# Altium PCB newest.PcbDoc
Units mil, origin at the board's own origin, x right, y up, seen from the top; angles counter-clockwise.
Board outline 1180 x 2621.21 mil, 4 copper layers (Top Layer, GND, 3v3, Bottom Layer), stack 23.756 mil thick; 54 components, 49 nets, 266 pads, 40 vias.
Unrouted connection lines stored in the file: 44.
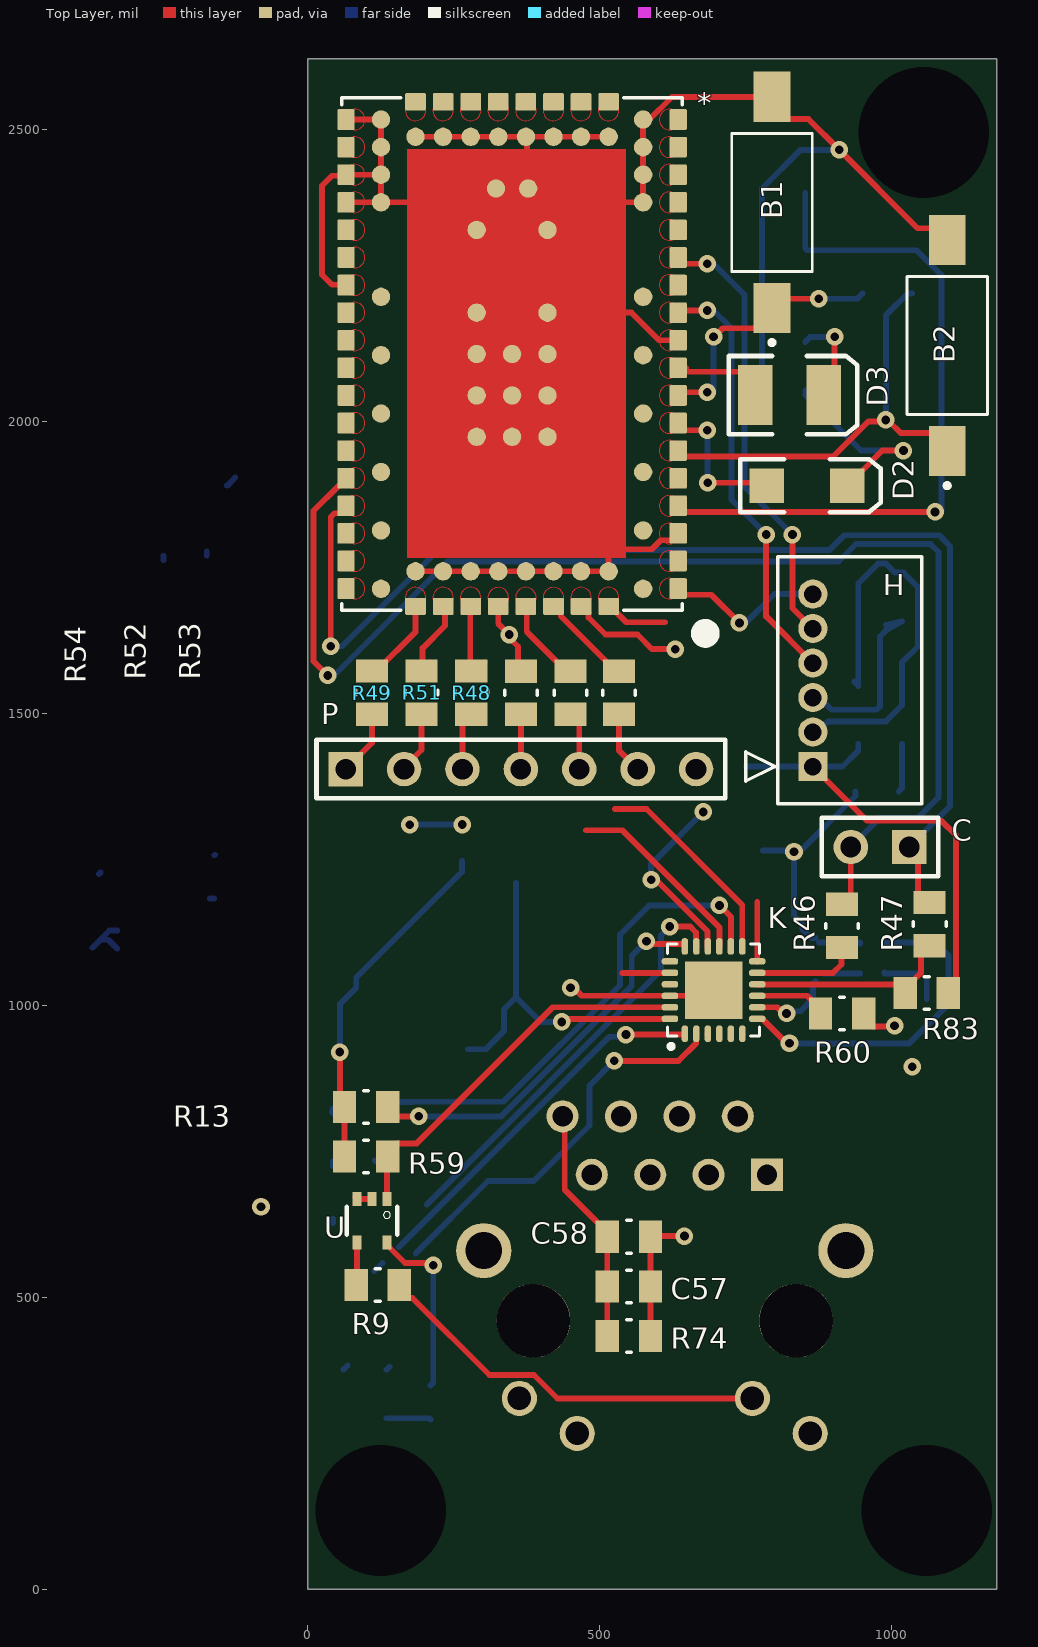
[diagram p0: Top Layer view]
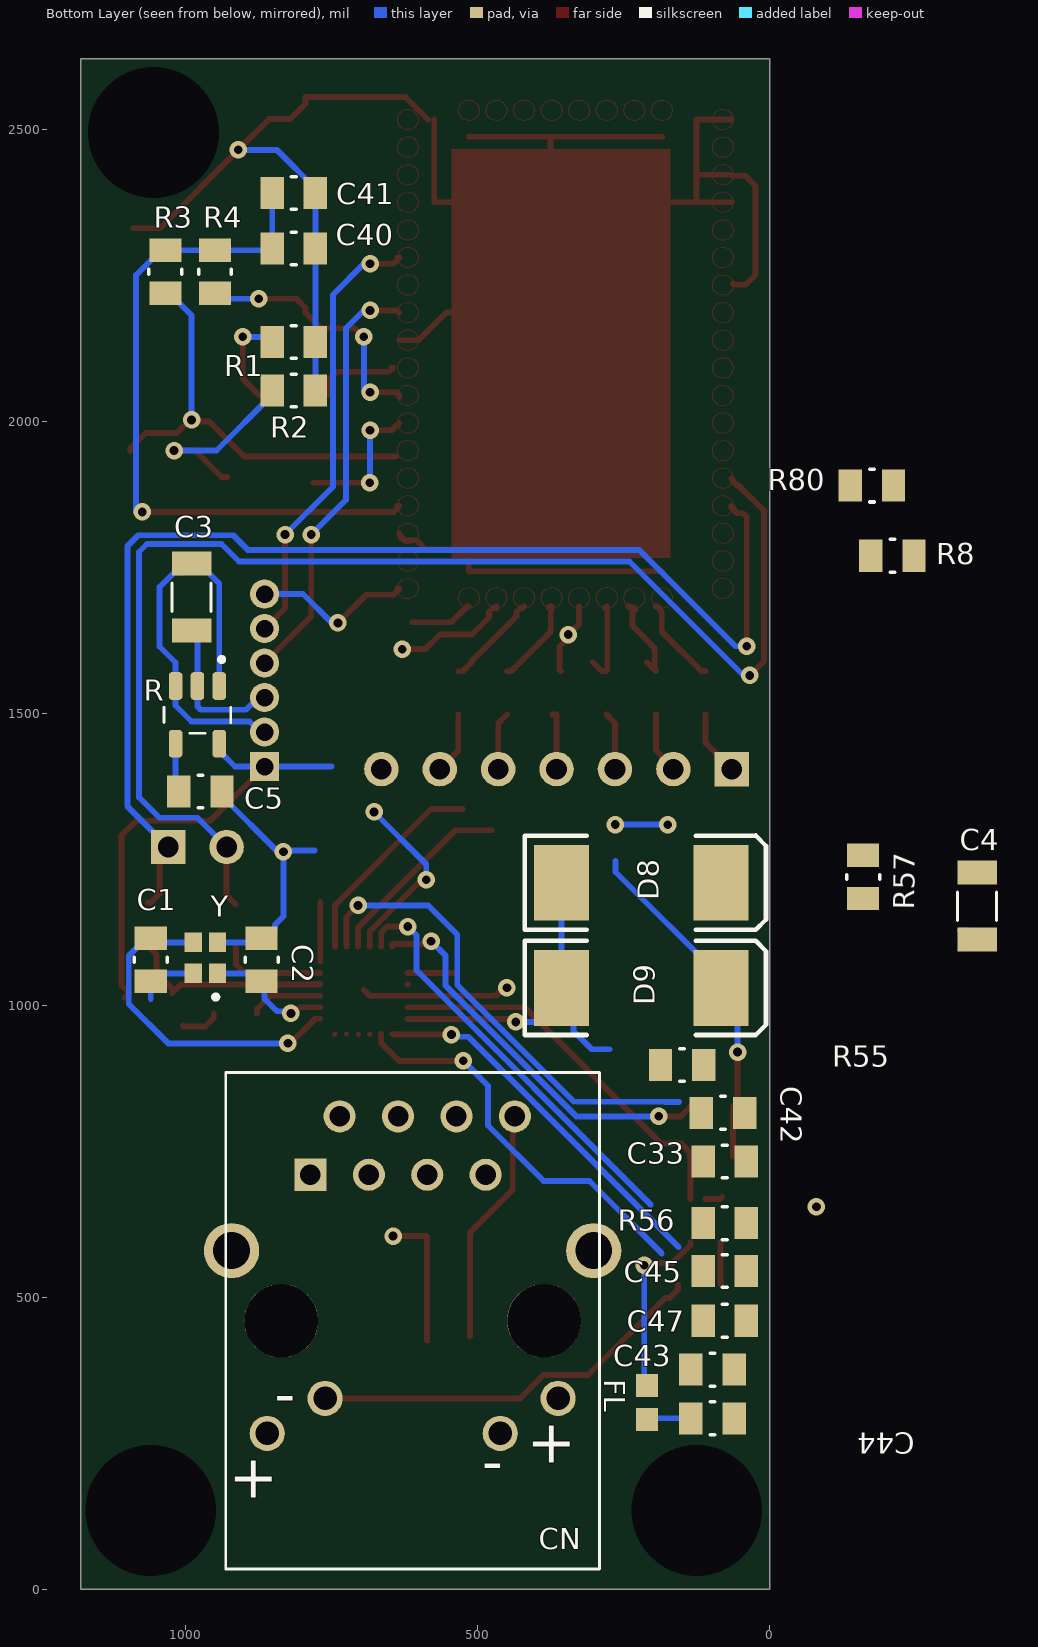
[diagram p1: Bottom Layer view, seen from below]
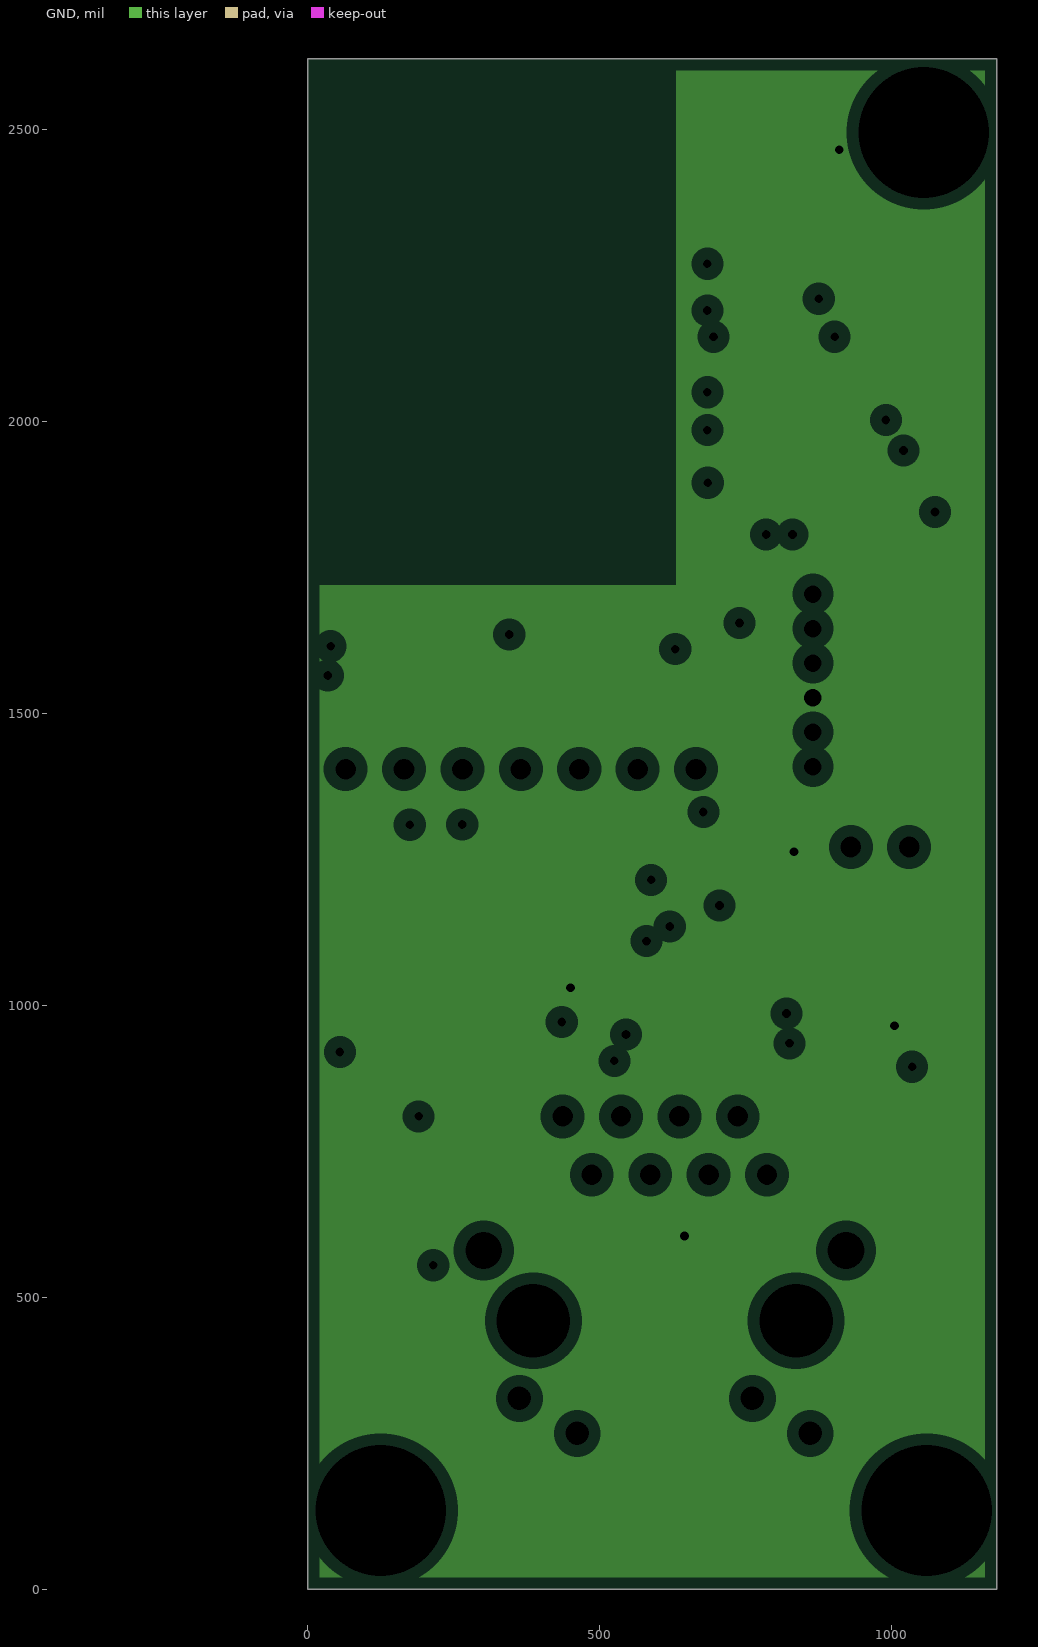
[diagram p2: GND, clearances drawn from the general rule]
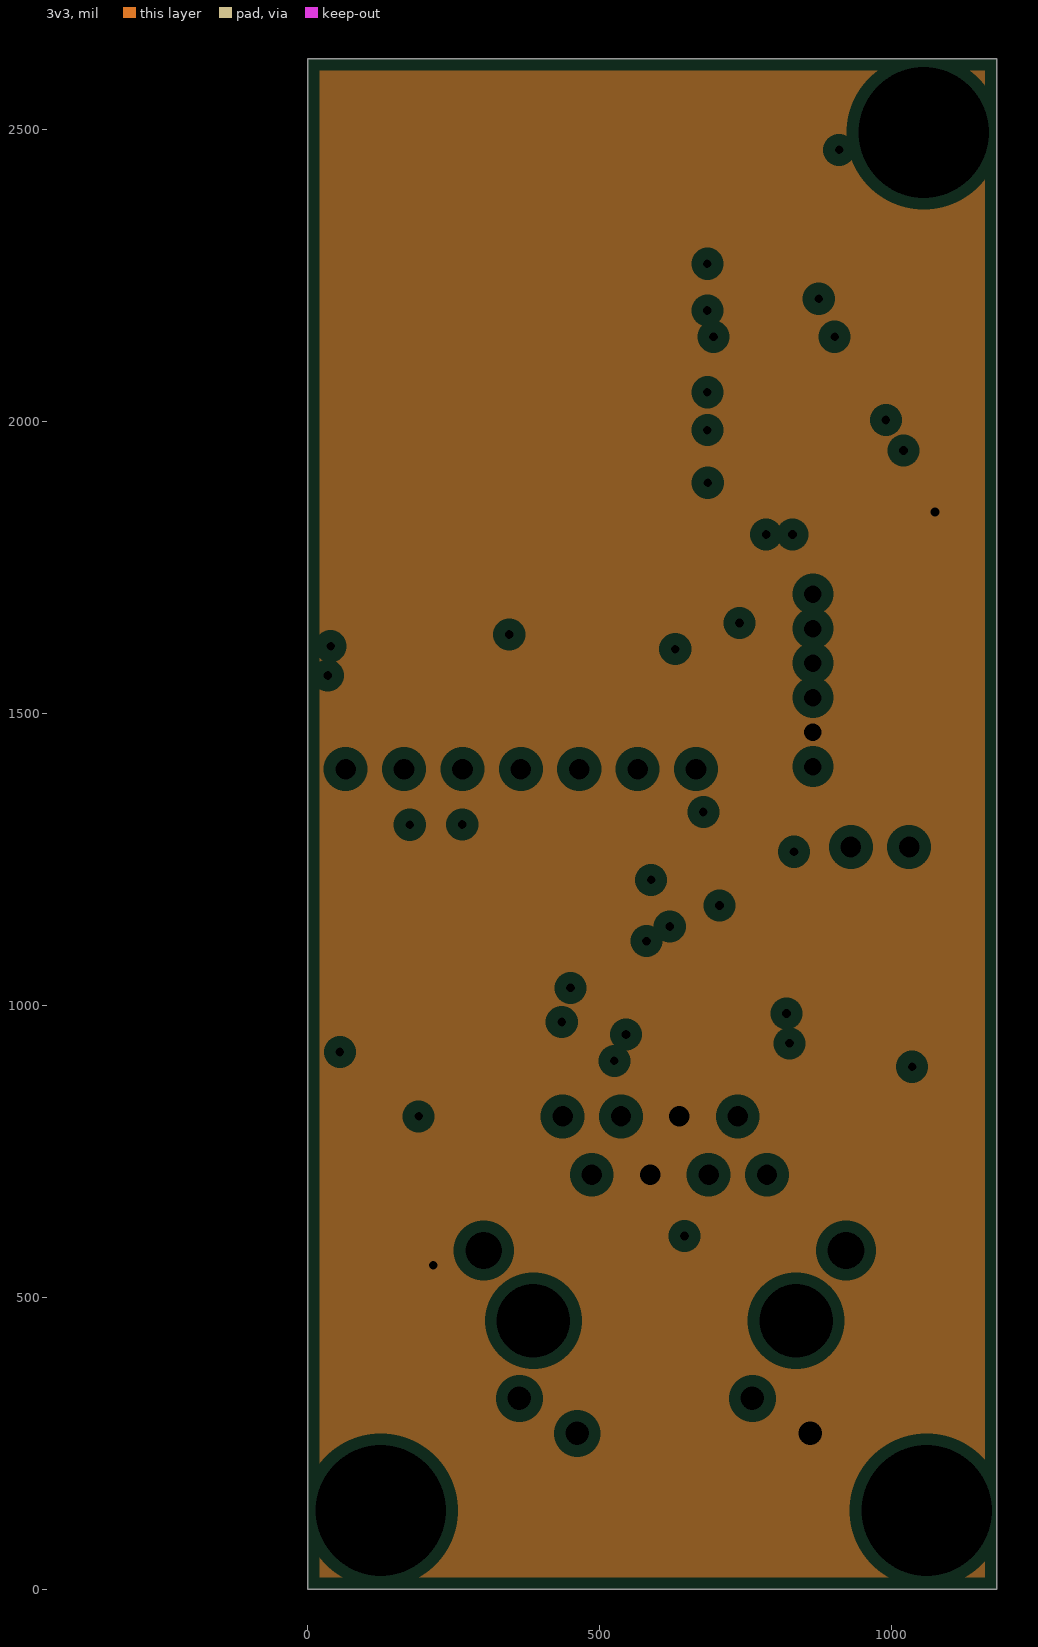
[diagram p3: 3v3, clearances drawn from the general rule]

## Layer stack, top to bottom
Top Solder: solder mask 0.4, Solder Resist, Dk 3.5
Top Layer: signal copper 1.4
Dielectric 2: prepreg 2.8, PP-006, Dk 4.1
GND: plane copper 1.378, net GND
Dielectric 1: dielectric 12.6, FR-4, Dk 4.8
3v3: plane copper 1.378, net 3v3
Dielectric 3: prepreg 2.8, PP-006, Dk 4.1
Bottom Layer: signal copper 1.4
Bottom Solder: solder mask 0.4, Solder Resist, Dk 3.5

## Board outline
0,2621.21 0,0 1180,0 1180,2621.21

## Design rules (kind name [scope] priority, off if disabled: settings)
Clearance [All] p1: gap=5 ignorepadtopadclearanceinfootprint=FALSE // Default=10mil
DiffPairsRouting [All] p1: maxlimit=10 minlimit=10 mostfreqgap=10 toplayer_minwidth=8 toplayer_maxwidth=15 toplayer_prefwidth=15 bottomlayer_minwidth=10 bottomlayer_maxwidth=15 bottomlayer_prefwidth=15 maxuncoupledlength=500 // DefaultMinWidth=15mil
HoleSize [All] p1: absolutevalues=TRUE maxlimit=150 minlimit=1 maxpercent=80.000 minpercent=20.000 // MaximumDefault=100mil
MinimumSolderMaskSliver [All] p1: minsoldermaskwidth=1 // Default=10mil
PlaneClearance [All] p1: clearance=20
PlaneConnect [All] p1: planeconnectstyle=Relief reliefexpansion=20 reliefentries=4 reliefconductorwidth=10 reliefairgap=10
PolygonConnect [All] p1: connectstyle=Relief reliefconductorwidth=10 reliefentries=4 polygonreliefangle="90 Angle" airgapwidth=10
RoutingVias [All] p1: holewidth=28 width=50 viastyle="Through Hole" minholewidth=28 minwidth=50 maxholewidth=28 maxwidth=50
SilkToSolderMaskClearance [IsPad] p1: minsilkscreentomaskgap=4 clearancetoexposedcopper=TRUE // Default=10mil
SolderMaskExpansion [All] p1: expansion=4 istentingtop=FALSE
Width [All] p1: maxlimit=10 minlimit=8 preferedwidth=10 minimp=50.000000 maximp=50.000000 favimp=50.000000 // MinWidthDefault=10mil
24 further rules are at their usual default settings.

## Classes and differential pairs
differential pair PHY_TX: +PHY_TX_P -PHY_TX_N
differential pair PHY_RX: +PHY_RX_P -PHY_RX_N

## Components (designator, comment, footprint, x,y, rotation, side; value= is the part's Value field where it differs from the comment)
* "ODIN-W262" ODIN-W262 349.95,2115.35 r90 top
B1 "push button" TECO-FSMSM 795,2375 r90 top
B2 "push button" TECO-FSMSM 1095,2130 r90 top
C "Header 2" HDR1X2 1030,1271.21 r180 top
C1 "22uF 10V" 0805 1060,1078.21 r270 bottom value=22uF
C2 "22uF 10V" 0805 870,1078.21 r90 bottom value=22uF
C3 "10UF 25V" 1206 990,1699.24 r270 bottom value=10uF
C4 "10UF 25V" 1206 -355,1170 r270 bottom value=10uF
C5 "10nF 50V" 0805 975,1366.21 r180 bottom value=10nF
C33 "2.2uF 16V" 0805 77,732.75 r0 bottom value=2.2uF
C40 "100nF 50V" 0805 815,2296.21 r0 bottom value=100nF
C41 "100nF 50V" 0805 815,2391.21 r0 bottom value=100nF
C42 "100nF 50V" 0805 80,816.02 r0 bottom value=100nF
C43 "2.2uF 16V" 0805 98,376.18 r0 bottom value=2.2uF
C44 "100nF 50V" 0805 98,292.9 r0 bottom value=100nF
C45 "100nF 50V" 0805 77,545 r0 bottom value=100nF
C47 "100nF 50V" 0805 77,460 r0 bottom value=100nF
C57 "100nF 50V" 0805 550,518.79 r0 top value=100nF
C58 "100nF 50V" 0805 550,603.79 r0 top value=100nF
CN "CN J00-0045NL" "RJ45 J00-0045NL" 611.47,460 r0 bottom
D2 "LED2" 3.2X1.6X1.1 855,1890 r0 top
D3 "LED3" 3.5X2.8X1.9 825,2045 r0 top
D8 "Diode" SMC 220,1210 r180 bottom
D9 "Diode" SMC 220,1030 r180 bottom
FL "BLM18PG300SN1D" BEADC1608X95N 210,320 r270 bottom
H "S6B-ZR(LF)(SN)" S6B-ZR_JST 865,1409.05 r90 top
K "KSZ8081RNAIA-TR" QFN50P400X400X90-25N 695,1026.21 r90 top
P "Header 7" HDR1X7 65,1404.54 r0 top
R "LP2992IM5-1.8" SOT95P280X145-5N 980,1497.5 r270 bottom
R1 "270" 0805 815,2136.21 r0 bottom
R2 "270" 0805 815,2052.94 r0 bottom
R3 "1k" 0805 1035,2256.21 r90 bottom
R4 "1k" 0805 950,2256.21 r90 bottom
R8 "JUMPER" 0805 -210,1770 r180 bottom value=0
R9 "120" 0805 120,521.21 r180 top
R13 "1k" 0805 100,826.21 r180 top
R46 "10.0" 0805 915,1136.21 r90 top
R47 "10.0" 0805 1065,1139.21 r90 top
R48 "10.0" 0805 280,1535.63 r270 top
R49 "10.0" 0805 110,1535.63 r270 top
R51 "10.0" 0805 195,1535.63 r270 top
R52 "10.0" 0805 450,1535.24 r90 top
R53 "10.0" 0805 533.28,1535.24 r90 top
R54 "10.0" 0805 365,1535.24 r90 top
R55 "1k" 0805 150,898.12 r180 bottom
R56 "1k" 0805 77,627.1 r180 bottom
R57 "1k" 0805 -160,1220 r90 bottom
R59 "1k" 0805 100,741.21 r0 top
R60 "6.8k" 0805 915,986.21 r180 top
R74 "16m" 0805 550,433.79 r180 top
R80 "JUMPER" 0805 -175,1890 r0 bottom value=0
R83 "4.7k" 0805 1060,1021.21 r180 top
U "NC7SZ125" SC70-5 110,631.21 r180 top
Y "ECS-250-10-37-JTN-TR" XTAL_ECS-250-10-37-JTN-TR 966.51,1081.21 r90 bottom

## Footprints (in the part's own frame and the unit in brackets; to place one, negate y for a bottom-side part, rotate by r counter-clockwise, add the part's x,y. Pads: shape width x height; smd on the part's side, far side on the other; paste and mask are expansions set on the pad)
3.2X1.6X1.1 [mm]
  rect 1.5x1.5 smd: 1(-1.75,0) 2(1.75,0)
  silkscreen extent -2.9,-1.15 3.2,1.15
3.5X2.8X1.9 [mm] "SM LED; 2 C-Bend Leads; Body 3.5 x 2.8 x 1.9 mm, inc leads (LxWxH typ)"
  rect 1.5x2.6 smd: 1(-1.5,0) 2(1.5,0)
  silkscreen extent -2.65,-1.7 2.95,1.7
0805 [mil]
  rect 40x55 smd: 1(-37,0) 2(37,0)
  silkscreen extent -4,-28 4,28
1206 [mm]
  rect 1.05x1.72 smd: 1(-1.46,0) 2(1.46,0)
  silkscreen extent -0.62,-0.85 0.62,0.85
BEADC1608X95N [mm]
  rect 1x0.97 smd: 1(-0.735,0) 2(0.735,0)
HDR1X2 [mm] "Connector; Header; 2 Position"
  rect 1.5x1.5 hole 0.9: 1(0,0)
  round 1.5 hole 0.9: 2(2.54,0)
  silkscreen extent -1.27,-1.27 3.81,1.27
HDR1X7 [mm] "Connector; Header; 7 Position"
  rect 1.5x1.5 hole 0.9: 1(0,0)
  round 1.5 hole 0.9: 2(2.54,0) 3(5.08,0) 4(7.62,0) 5(10.16,0) 6(12.7,0) 7(15.24,0)
  silkscreen extent -1.27,-1.27 16.51,1.27
ODIN-W262 [mm]
  round 0.8 smd: 1(6.6,-5.7) 2(7.8,-5.7) 3(9,-5.7) 4(10.2,-5.7) 5(9.45,-4.2) 6(9.45,-3) 7(9.45,-1.8) 8(9.45,-0.6) 9(9.45,0.6) 10(9.45,1.8) 11(9.45,3) 12(9.45,4.2) 13(10.2,5.7) 14(9,5.7) 15(7.8,5.7) 16(6.6,5.7) 17(-9.45,4.2) 18(-9.45,3) 19(-9.45,1.8) 20(-9.45,0.6) 21(-9.45,-0.6) 22(-9.45,-1.8) 23(-9.45,-3) 24(-9.45,-4.2) 25(-3.6,-1.54) 26(-1.8,-1.54) 27(0,-1.54) 28(1.8,-1.54) 29(5.4,-1.54) 30(7.2,-0.7) 31(-3.6,0) 32(-1.8,0) 33(0,0) 34(-3.6,1.54) 35(-1.8,1.54) 36(0,1.54) 37(1.8,1.54) 38(5.4,1.54) 39(7.2,0.7) TP1(2.49,-5.7) TP2(2.49,5.7) TP3(-0.05,-5.7) TP4(-0.05,5.7) TP5(-2.59,-5.7) TP6(-2.59,5.7) TP7(-5.13,-5.7) TP8(-5.13,5.7) TP9(-7.67,-5.7) TP10(-7.67,5.7) TP11(-10.21,-5.7) TP12(-10.21,5.7)
  rrect15% 0.9x0.75 smd paste-1 mask+0: A1(-10.2,-7.225) A2(-9,-7.225) A3(-7.8,-7.225) A4(-6.6,-7.225) A5(-5.4,-7.225) A6(-4.2,-7.225) A7(-3,-7.225) A8(-1.8,-7.225) A9(-0.6,-7.225) A10(0.6,-7.225) A11(1.8,-7.225) A12(3,-7.225) A13(4.2,-7.225) A14(5.4,-7.225) A15(6.6,-7.225) A16(7.8,-7.225) A17(9,-7.225) A18(10.2,-7.225) C1(10.2,7.225) C2(9,7.225) C3(7.8,7.225) C4(6.6,7.225) C5(5.4,7.225) C6(4.2,7.225) C7(3,7.225) C8(1.8,7.225) C9(0.6,7.225) C10(-0.6,7.225) C11(-1.8,7.225) C12(-3,7.225) C13(-4.2,7.225) C14(-5.4,7.225) C15(-6.6,7.225) C16(-7.8,7.225) C17(-9,7.225) C18(-10.2,7.225)
  rrect15% 0.75x0.9 smd paste-1 mask+0: B1(10.975,-4.2) B2(10.975,-3) B3(10.975,-1.8) B4(10.975,-0.6) B5(10.975,0.6) B6(10.975,1.8) B7(10.975,3) B8(10.975,4.2) D1(-10.975,4.2) D2(-10.975,3) D3(-10.975,1.8) D4(-10.975,0.6) D5(-10.975,-0.6) D6(-10.975,-1.8) D7(-10.975,-3) D8(-10.975,-4.2)
  Top Layer circle w0: c10.2,6.85 r0.45
  Top Layer circle w0: c10.6,4.2 r0.45
  Top Layer circle w0: c10.6,3 r0.45
  Top Layer circle w0: c10.6,1.8 r0.45
  Top Layer circle w0: c10.6,0.6 r0.45
  Top Layer circle w0: c10.6,-0.6 r0.45
  Top Layer circle w0: c10.6,-1.8 r0.45
  Top Layer circle w0: c10.6,-3 r0.45
  Top Layer circle w0: c10.6,-4.2 r0.45
  Top Layer circle w0: c4.2,6.85 r0.45
  Top Layer circle w0: c5.4,6.85 r0.45
  Top Layer circle w0: c9,6.85 r0.45
  Top Layer circle w0: c-10.2,6.85 r0.45
  Top Layer circle w0: c-9,6.85 r0.45
  Top Layer circle w0: c-7.8,6.85 r0.45
  Top Layer circle w0: c-4.2,6.85 r0.45
  Top Layer circle w0: c-3,6.85 r0.45
  Top Layer circle w0: c-1.8,6.85 r0.45
  Top Layer circle w0: c-0.6,6.85 r0.45
  Top Layer circle w0: c0.6,6.85 r0.45
  Top Layer circle w0: c1.8,6.85 r0.45
  Top Layer circle w0: c-5.4,-6.85 r0.45
  Top Layer circle w0: c-9,-6.85 r0.45
  Top Layer circle w0: c10.2,-6.85 r0.45
  Top Layer circle w0: c9,-6.85 r0.45
  Top Layer circle w0: c7.8,-6.85 r0.45
  Top Layer circle w0: c6.6,-6.85 r0.45
  Top Layer circle w0: c5.4,-6.85 r0.45
  Top Layer circle w0: c3,-6.85 r0.45
  Top Layer circle w0: c4.2,-6.85 r0.45
  Top Layer lines w0: -5.414,7.3 cw(c-5.4,6.85) -5.4,6.4 cw(c-5.4,6.85) -5.667,6.488 cw(c-5.4,6.85) -5.486,7.292 cw(c-5.4,6.85) -5.414,7.3 ; 2.968,7.299 cw(c3,6.85) 3.07,7.295 cw(c3,6.85) 3.131,7.281 cw(c3,6.85) 3,6.4 cw(c3,6.85) 2.968,7.299 ; 7.756,7.298 cw(c7.8,6.85) 7.8,6.4 cw(c7.8,6.85) 7.669,7.281 cw(c7.8,6.85) 7.756,7.298 ; 6.53,7.295 cw(c6.6,6.85) 6.6,6.4 cw(c6.6,6.85) 6.53,7.295 ; -6.731,7.281 ccw(c-6.6,6.85) -6.6,6.4 ccw(c-6.6,6.85) -6.731,7.281 ; -11.031,4.331 ccw(c-10.6,4.2) -11.042,4.286 ccw(c-10.6,4.2) -11.045,4.27 ccw(c-10.6,4.2) -11.047,4.251 ccw(c-10.6,4.2) -11.05,4.207 ccw(c-10.6,4.2) -11.05,4.2 ccw(c-10.6,4.2) -11.045,4.13 ccw(c-10.6,4.2) -10.6,3.75 ccw(c-10.6,4.2) -11.031,4.331 ; -11.031,3.131 cw(c-10.6,3) -10.6,2.55 cw(c-10.6,3) -11.05,3 cw(c-10.6,3) -11.045,3.07 cw(c-10.6,3) -11.037,3.107 cw(c-10.6,3) -11.031,3.131 ; -11.05,1.8 ccw(c-10.6,1.8) -11.045,1.73 ccw(c-10.6,1.8) -10.6,1.35 ccw(c-10.6,1.8) -11.05,1.8 ; -11.047,0.651 ccw(c-10.6,0.6) -11.05,0.6 ccw(c-10.6,0.6) -11.031,0.469 ccw(c-10.6,0.6) -10.6,0.15 ccw(c-10.6,0.6) -11.047,0.651 ; -11.05,-0.6 cw(c-10.6,-0.6) -10.6,-1.05 cw(c-10.6,-0.6) -11.031,-0.731 cw(c-10.6,-0.6) -11.05,-0.619 cw(c-10.6,-0.6) -11.05,-0.6 ; -11.048,-1.762 ccw(c-10.6,-1.8) -11.05,-1.8 ccw(c-10.6,-1.8) -11.045,-1.87 ccw(c-10.6,-1.8) -11.039,-1.901 ccw(c-10.6,-1.8) -11.031,-1.931 ccw(c-10.6,-1.8) -10.6,-2.25 ccw(c-10.6,-1.8) -11.048,-1.762 ; -11.031,-2.869 ccw(c-10.6,-3) -11.05,-3 ccw(c-10.6,-3) -11.049,-3.032 ccw(c-10.6,-3) -11.043,-3.076 ccw(c-10.6,-3) -11.042,-3.086 ccw(c-10.6,-3) -11.034,-3.118 ccw(c-10.6,-3) -11.031,-3.131 ccw(c-10.6,-3) -10.6,-3.45 ccw(c-10.6,-3) -11.031,-2.869 ; -11.05,-4.2 ccw(c-10.6,-4.2) -11.031,-4.331 ccw(c-10.6,-4.2) -10.975,-4.449 ccw(c-10.6,-4.2) -10.6,-4.65 ccw(c-10.6,-4.2) -11.05,-4.2 ; 0.6,-6.4 cw(c0.6,-6.85) 0.6,-7.3 cw(c0.6,-6.85) 0.6,-6.4 ; -8.067,-6.488 ccw(c-7.8,-6.85) -8.098,-6.513 ccw(c-7.8,-6.85) -7.8,-7.3 ccw(c-7.8,-6.85) -8.067,-6.488 ; -10.069,-7.281 ccw(c-10.2,-6.85) -10.27,-7.295 ccw(c-10.2,-6.85) -10.2,-7.3 ccw(c-10.2,-6.85) -10.114,-7.292 ccw(c-10.2,-6.85) -10.069,-7.281 ; -3.131,-7.281 ccw(c-3,-6.85) -3.057,-7.296 ccw(c-3,-6.85) -3,-7.3 ccw(c-3,-6.85) -3.131,-7.281 ; -0.514,-7.292 cw(c-0.6,-6.85) -0.6,-7.3 cw(c-0.6,-6.85) -0.614,-7.3 cw(c-0.6,-6.85) -0.67,-7.295 cw(c-0.6,-6.85) -0.514,-7.292 ; -6.67,-7.295 ccw(c-6.6,-6.85) -6.613,-7.3 ccw(c-6.6,-6.85) -6.6,-7.3 ccw(c-6.6,-6.85) -6.67,-7.295 ; -4.27,-7.295 cw(c-4.2,-6.85) -4.169,-7.299 cw(c-4.2,-6.85) -4.2,-7.3 cw(c-4.2,-6.85) -4.27,-7.295 ; -1.87,-7.295 cw(c-1.8,-6.85) -1.73,-7.295 cw(c-1.8,-6.85) -1.787,-7.3 cw(c-1.8,-6.85) -1.8,-7.3 cw(c-1.8,-6.85) -1.87,-7.295 ; 1.87,-7.295 cw(c1.8,-6.85) 1.849,-7.297 cw(c1.8,-6.85) 1.8,-7.3 cw(c1.8,-6.85) 1.87,-7.295
  silkscreen extent -12.4,-8.65 11.15,7.4, body extent -11.15,-7.4 11.15,7.4, height 4.8
QFN50P400X400X90-25N [mm]
  rrect70% 0.71x0.27 smd: 1(-1.9,1.25) 2(-1.9,0.75) 3(-1.9,0.25) 4(-1.9,-0.25) 5(-1.9,-0.75) 6(-1.9,-1.25) 13(1.9,-1.25) 14(1.9,-0.75) 15(1.9,-0.25) 16(1.9,0.25) 17(1.9,0.75) 18(1.9,1.25)
  rrect70% 0.27x0.71 smd: 7(-1.25,-1.9) 8(-0.75,-1.9) 9(-0.25,-1.9) 10(0.25,-1.9) 11(0.75,-1.9) 12(1.25,-1.9) 19(1.25,1.9) 20(0.75,1.9) 21(0.25,1.9) 22(-0.25,1.9) 23(-0.75,1.9) 24(-1.25,1.9)
  rect 2.5x2.5 smd paste-2: 25(0,0)
  silkscreen extent -2.55,-2 2,2
"RJ45 J00-0045NL" [mm]
  rect 1.398x1.398 hole 0.89: 1(4.445,-6.35)
  round 1.398 hole 0.89: 2(3.175,-8.89) 3(1.905,-6.35) 4(0.635,-8.89) 5(-0.635,-6.35) 6(-1.905,-8.89) 7(-3.175,-6.35) 8(-4.445,-8.89)
  round 1.53 hole 1.02: 9(6.325,4.9) 10(3.81,3.38) 11(-3.81,4.9) 12(-6.325,3.38)
  round 3.2 hole 3.2 unplated: None(-5.715,0) None(5.715,0)
  round 2.4 hole 1.6: S1(-7.875,-3.05) S2(7.875,-3.05)
  silkscreen extent -8.13,-10.79 8.13,10.79
S6B-ZR_JST [mil]
  rect 50x50 hole 30 mask+0: 1(0,0)
  round 50 hole 30 mask+0: 2(59.06,0) 3(118.11,0) 4(177.17,0) 5(236.22,0) 6(295.28,0)
  silkscreen extent -64,-186 359,115, body extent 0,0 10,10, height 10
SC70-5 [mm]
  rect 0.4x0.6 smd: 1(-0.65,-0.95) 2(0,-0.95) 3(0.65,-0.95) 4(0.65,0.95) 5(-0.65,0.95)
  silkscreen extent -1.1,-0.6 1.1,0.6
SMC [mm] "DO-214-AB/SMC; 2 C-Bend Leads; Body 7.9 x 5.9 mm, inc. leads (LxW)"
  rect 2.4x3.3 smd: 1(-3.475,0) 2(3.475,0)
  silkscreen extent -5.07,-2.05 5.43,2.05
SOT95P280X145-5N [mm]
  rrect50% 1.21x0.59 smd: 1(-1.255,0.95) 2(-1.255,0) 3(-1.255,-0.95) 4(1.255,-0.95) 5(1.255,0.95)
  silkscreen extent -2.51,-1.45 0.8,1.45
TECO-FSMSM [mm]
  rect 2.19x1.6 smd: 1(-4.59,0) 2(4.59,0)
  silkscreen extent -6.2,-1.75 3,1.75
XTAL_ECS-250-10-37-JTN-TR [mm]
  rect 0.85x0.75 smd: 1(-0.675,-0.525) 2(0.675,-0.525) 3(0.675,0.525) 4(-0.675,0.525)
  silkscreen extent -1.8,-0.55 -1.6,-0.35

## Part data
B1 B2: library part Teco-FSMSM
C: "Header, 2-Pin", LatestRevisionDate=17-Jul-2002, LatestRevisionNote="Re-released for DXP Platform.", Publisher="Altium Limited"
C1 C2: library part "CAP 22uF 10V", "CAP CER 2.2UF 10V X5R 0805", Operating Temperature="-55°C ~ 85°C", Package=0805, Rating=10V, Temperature Coefficient=X5R, Tolerance=20%
C3 C4: library part "CAP 10uF 25V", "CAP CER 10UF 25V X5R 1206", Operating Temperature="-55°C ~ 85°C", Package=1206, Rating=25V, Temperature Coefficient=X5R, Tolerance=10%
C5: library part "CAP 10nF 50V", "CAP CER 10000PF 50V X7R 0805", Operating Temperature="-55°C ~ 125°C", Package=0805, Rating=50V, Temperature Coefficient=X7R, Tolerance=10%
C33 C43: library part "CAP 2.2uF 16V", "CAP CER 2.2UF 16V X7R 0805", Operating Temperature="-55°C ~ 125°C", Package=0805, Rating=16V, Temperature Coefficient=X7R, Tolerance=10%
C40 C41 C42 C44 C45 C47 C57 C58: library part "CAP 100nF 50V", "CAP CER 0.1UF 50V X7R 0805", Package=0805, Rating=50V, Tolerance=10%
CN: library part "CN MAGJACK", "CN MAGJACK 1PORT 100 BASE-TX", Package=None, Supplier Part Number 1=673-J00-0045NL, Digikey=553-1619-5-ND, Digikey Link=https://www.digikey.com/product-detail/en/pulse-electronics-network/J00-0045NL/553-1619-5-ND/1036860?utm_source=snapeda&utm_medium=aggregator&utm_campaign=symbol, MF="Pulse Electronics", MP=J00-0045NL, SnapEDA_Link=https://www.snapeda.com/parts/J00-0045NL/Pulse%20Electronics%20Network/view-part/87956/?ref=snap, Supplier 1=Mouser
D2: library part "LED RED SMD", "Typical RED, GREEN, YELLOW, AMBER GaAs LED", Color=Red, Current - Test=20mA, Lens Color=Colorless, Package=1206, Voltage - Forward (Vf) (Typ)=1.7V, Lens Transparency=Clear
D3: "Typical BLUE SiC LED", DatasheetVersion=16-Apr-2002, LatestRevisionDate=17-Dec-2003, LatestRevisionNote="PCB Footprint replaced.", PackageDescription="SM LED; 2 C-Bend Leads; Body 3.5 x 2.8 x 1.9 mm, inc leads (LxWxH typ)", PackageReference=3.5X2.8X1.9, PackageVersion=16-Apr-2002, Published=8-Jun-2000, Publisher="Altium Limited"
D8 D9: "Default Diode", Code_JEDEC=DO-214-AB, LatestRevisionDate=17-Jul-2002, LatestRevisionNote="Re-released for DXP Platform.", PackageDescription="DO-214-AB/SMC; 2 C-Bend Leads; Body 7.9 x 5.9 mm, inc. leads (LxW)", PackageReference=SMC, PackageVersion=Sep-1996, Published=8-Jun-2000, Publisher="Altium Limited"
FL: "30 Ohms @ 100MHz 1 Power Line Ferrite Bead 0603 _1608 Metric_ 1A 50mOhm", Package="1608 Murata", Availability=Unavailable, MF=Murata, MP=BLM18PG300SN1D, Price=None, SnapEDA_Link=https://www.snapeda.com/parts/BLM18PG300SN1D/Murata/view-part/270173/?ref=snap
H: "No Description Available", Built_By=EMA_UL_Team, Copyright="Copyright (C) 2018 Accelerated Designs. All rights reserved", Manufacturer_Part_Number=S6B-ZR(LF)(SN), RefDes=RefDes, SourceLibrary=JST_2017-04-18, Type=DEV, Vendor=JST
K: "1/1 Transceiver Full RMII 24-QFN _4x4_", Package="QFN-24 Microchip", Availability=Unavailable, MF=Microchip, MP=KSZ8081RNAIA-TR, Price=None, SnapEDA_Link=https://www.snapeda.com/parts/KSZ8081RNAIA-TR/Microchip/view-part/482545/?ref=snap
P: "Header, 7-Pin", LatestRevisionDate=17-Jul-2002, LatestRevisionNote="Re-released for DXP Platform.", Publisher="Altium Limited"
R: Package=None, Availability=Unavailable, MP=LP2992IM5-1.8/NOPB, Price=None
R1 R2: library part "RES 270 1/8W", "RES SMD 270 OHM 5% 1/8W 0805", Package=0805, Power (Watts)=0.125W, Tolerance=5%
R3 R4 R13 R55 R56 R57 R59: library part "RES 1k 1/8W", "RES SMD 1K OHM 5% 1/8W 0805", Package=0805, Power (Watts)=0.125W, Tolerance=5%
R8 R80: library part "RES 0 JUMPER", "RES SMD 0 OHM JUMPER GENERIC 0805", Package=0805
R9: library part "RES 120.0 1/8W", "RES SMD 120 OHM 5% 1/8W 0805", Package=0805, Power (Watts)=0.125W, Tolerance=5%
R46 R47 R48 R49 R51 R52 R53 R54: library part "RES 10.0 1/8W - 5%", "RES SMD 10.0 OHM 5% 1/8W 0805", Package=0805, Power (Watts)=0.125W, Tolerance=5%
R60: library part "RES 6.8k 1/8W", "RES SMD 6.8K OHM 5% 1/8W 0805", Package=0805, Power (Watts)=0.125W, Tolerance=5%
R74: library part "RES 16m 1/2W", "RES SMD 0.016 OHM 1% 1/2W 0805 Thick Film", Case Code (Imperial)=0805, Case Code (Metric)=2012, Manufacturer=Panasonic, Manufacturer Part Number=ERJ-6BWFR016V, Max Operating Temperature=155°C, Max Power Dissipation=500mW, Min Operating Temperature=-55°C, Package Quantity=1, Resistance=16mR, Supplier Part Number 1=P.016AQCT-ND, Temperature Coefficient=200ppm/°C, Tolerance=1%, Case/Package=0805, Category="Chip SMD Resistors", ComponentLink1Description=https://datasheet.ciiva.com/11808/0900766b8126441d-11808690.pdf?src-supplier=RSComponents, ComponentLink1URL=https://datasheet.ciiva.com/11808/0900766b8126441d-11808690.pdf?src-supplier=RSComponents, ComponentLink2Description=https://datasheet.ciiva.com/2452/aoa0000ce3-2452594.pdf?src-supplier=Digi-Key, ComponentLink2URL=https://datasheet.ciiva.com/2452/aoa0000ce3-2452594.pdf?src-supplier=Digi-Key, ComponentLink3Description=https://datasheet.ciiva.com/2452/aoa0000ce3-2452592.pdf?src-supplier=Digi-Key, ComponentLink3URL=https://datasheet.ciiva.com/2452/aoa0000ce3-2452592.pdf?src-supplier=Digi-Key, ComponentLink4Description=https://datasheet.ciiva.com/2452/aoa0000ce3-2452593.pdf?src-supplier=Digi-Key, ComponentLink4URL=https://datasheet.ciiva.com/2452/aoa0000ce3-2452593.pdf?src-supplier=Digi-Key, ComponentLink5Description=https://datasheet.ciiva.com/9192/aoa0000ce3-9192761.pdf?src-supplier=Avnet, ComponentLink5URL=https://datasheet.ciiva.com/9192/aoa0000ce3-9192761.pdf?src-supplier=Avnet, ComponentLink6Description=https://datasheet.ciiva.com/17211/aoa0000ce3-17211370.pdf?src-supplier=Avnet+Europe, ComponentLink6URL=https://datasheet.ciiva.com/17211/aoa0000ce3-17211370.pdf?src-supplier=Avnet+Europe, Composition="Thick Film", Contact Plating=Tin, Depth=1.25mm, Features="Automotive AEC-Q200", Height=0.028inch, Lead Free="Lead Free", Length=2mm, Military Standard=Not, Mount="Surface Mount", Number of Pins=2, Number of Terminations=2, Packaging="Tape and Reel", Power Rating=500mW, Pricing 1="1=0.65000, 10=0.53800, 100=0.36140, 1000=0.21148, 2500=0.20917 (USD)", Radiation Hardening=No, RoHS=Yes, Stock 1=4585, Supplier 1=Digi-Key, Termination=SMD/SMT, Width=0.049inch
R83: library part "RES 4.7k 1/8W - 5%", "RES SMD 4.7k OHM 5% 1/8W 0805", Package=0805, Power (Watts)=0.125W, Tolerance=5%
U: "Buffer, Non-Inverting 1 Element 1 Bit per Element 3-State Output SC-70-5", Package="SC-70 ON Semiconductor", Availability=Unavailable, MF="ON Semiconductor", MP=NC7SZ125, Price=None, SnapEDA_Link=https://www.snapeda.com/parts/NC7SZ125/ON%20Semiconductor/view-part/2686816/?ref=snap
Y: "SMD Crystal 2.0 x 1.6 x 0.45 mm ceramic package", Package=None, Availability=Unavailable, MP=ECS-250-10-37-JTN-TR, Price=None

## Free pads (board coordinates)
  round 125.98 hole 224 unplated: 6(125,135) 6(1055,2495) 6(1060,135)

## Via types
v1: diameter 30, hole 15, Top Layer to Bottom Layer, 38 vias
v2: diameter 30, hole 15, Top Layer to 3v3, 1 vias
v3: diameter 30, hole 15, Top Layer to GND, 1 vias

## Nets (pads, with @x,y where several pads share a name; then routed paths per layer and width w, separated by ;. In a path a pad name is that pad's centre, name@x,y a point inside that pad or via, vN(x,y) a via of type N, cw(c..) or ccw(c..) an arc to the next point about the centre after c; other vN are vias at no path point)
1v8: C4.1 D9.2 H.1 R13.2 R55.2 R57.1 R59.1 R83.1 R.5 | length 1403.5
  Top Layer w10: v1(55,920) 55,834.21 R13.2 R59.1 ; H.1 957.83,1316.21 1085,1316.21 1110,1291.21 1110,1034.21 R83.1 R83.1@1105,1013.21
  Bottom Layer w10: C4.1@-357.69,1224.79 C4.1 ; R57.1@-167.5,1183 R57.1 ; v1(55,920) 55,1001.81 D9.2 83.19,1047.72 263.97,1228.49 263.97,1247.47 ; 750.35,1409.05 H.1 915.76,1409.05 942.6,1435.89 R.5
3v3: *.A4 C3.1 C40.2 C41.2 CN.4 CN.5 CN.9 FL.1 H.2 R3.2 R4.2 R.1 R.3 U.5 | length 2207.6
  Top Layer w10: U.5 135.59,589.87 166.75,558.71 211.29,558.71 v1(215,555) ; *.A4 634.9,1855 *.A4@637.34,1855 ; *.A4@637.14,1852.76 637.14,1852.02 644.16,1845 v1(1074.32,1845) ; H.2@864.33,1468.1 H.2
  Bottom Layer w10: FL.1 215,353.94 v1(215,555) ; C41.2 C40.2 855,2293.21 1042.5,2293.21 1085,2250.71 v1@1085,1845 ; H.2 872.75,1468.1 890.86,1486.21 990,1486.21 1017.4,1513.61 R.3 1017.4,1587.14 1045,1614.74 1045,1716.21 1020.16,1741.06 1005.67,1741.06 C3.1 976.81,1756.73 942.6,1722.51 R.1 942.6,1547.82 R.1@936.05,1554.37
BlueLED: *.A9 D3.1 | length 144.4
  Top Layer w10: *.A9@645.08,2091.72 645.62,2091.18 *.A9@648.02,2091.18 ; *.A9@647.82,2088.99 651.8,2085 741.42,2085 755.94,2070.47 D3.1@755.94,2045
BYPASS: C5.1 R.4 | length 84.1
  Bottom Layer w10: C5.1 1017.4,1371.61 R.4
CRS_DV: K.15 P.4 R54.1 | length 442
  Top Layer w10: P.4@361.07,1396.67 P.4@368.93,1404.54 ; P.4 R54.1 R54.1@372.5,1498.24 ; 476.71,1300 538.46,1300 704.84,1133.62 K.15
Diode_2: D2.2 R2.2 | length 324.8
  Top Layer w10: D2.2@928.9,1905 938.9,1905 983.9,1950 v1(1020,1950)
  Bottom Layer w10: R2.2 852,2045.44 947.44,1950 v1(1020,1950)
Diode_3: D3.2 R1.2 | length 165.6
  Top Layer w10: D3.2@874.06,2045 902.29,2073.24 v1(902.29,2145)
  Bottom Layer w10: R1.2 860.39,2144.6 901.9,2144.6 v1(902.29,2145)
  other v2: 1035,895
ETH_CRSDV: *.D4 R54.2 R57.2 | length 127.5
  Top Layer w10: *.D4 326.33,1680.31 326.33,1653.67 v1(345,1635) 345,1629.59 360,1614.59 360,1574.74 R54.2@357.5,1572.24
  Bottom Layer w10: R57.2 R57.2@-158.93,1258.07
ETH_MDC: K.10 R47.1 R83.2 | length 368.7
  Top Layer w10: K.10@780.47,1036.69 780.16,1036.37 770.12,1036.37 K.10 1008.16,1036.06 R83.2 1023,1028.71 1050,1055.71 1050,1087.21 R47.1
ETH_MDIO: K.11 R46.1 | length 179.6
  Top Layer w10: K.11 899.53,1055.74 913.86,1070.07 913.86,1098.07 R46.1
ETH_REFCLK: *.D8 K.16 P.7 | length 422.1
  Top Layer w10: *.D8 518.26,1683.26 520.45,1681.07 545.3,1656.21 611.55,1656.21 ; v1(588.11,1215) 591.93,1211.17 600.04,1211.17 684.84,1126.37 684.84,1101.33 K.16 ; v1(677.5,1331.21) v1@680,1331.21
  Bottom Layer w10: v1(588.11,1215) 588.11,1241.82 v1(677.5,1331.21)
ETH_RXD0: *.D5 R52.2 | length 151
  Top Layer w10: *.D5@373.57,1680.31 *.D5@374.37,1680.31 ; *.D5 375,1681.83 375,1640 427.5,1587.5 427.5,1587.24 442.5,1572.24 R52.2 ; *.D5@376.53,1683.26 *.D5@378.72,1681.07
ETH_RXD1: *.D6 R53.2 | length 163.7
  Top Layer w10: *.D6 421.51,1682.56 423.56,1680.52 426.51,1680.52 433.53,1673.5 433.53,1666.47 510.78,1589.22 510.78,1587.24 525.78,1572.24 R53.2
ETH_TXD0: *.D1 R49.1 | length 152.1
  Top Layer w10: R49.1 117.5,1572.63 184.8,1639.93 184.8,1673.5 188.46,1677.16 188.46,1679.4 192.19,1683.12 192.32,1683.26 *.D1@195.28,1683.26
ETH_TXD1: *.D2 R51.1 | length 156.3
  Top Layer w10: R51.1@210,1587.63 R51.1 196.77,1574.41 196.77,1611.77 235,1650 235,1678.69 237.41,1681.11 239.57,1683.26 *.D2@242.52,1683.26 ; *.D2@229.69,1678.15 *.D2@231.84,1680.31
ETH_TXEN: *.D3 R48.1 | length 144.3
  Top Layer w10: *.D3@281.82,1680.52 *.D3 278.18,1682.35 278.18,1574.46 R48.1 285,1572.63 287.5,1572.63 R48.1@302.5,1587.63
GND: *.1 *.2 *.3 *.4 *.5 *.6 *.7 *.8 *.9 *.10 *.11 *.12 *.13 *.14 *.15 *.16 *.17 *.18 *.19 *.20 *.21 *.22 *.23 *.24 *.25 *.26 *.27 *.28 *.29 *.30 *.31 *.32 *.33 *.34 *.35 *.36 *.37 *.38 *.39 *.A3 *.A10 *.C1 *.C3 *.C4 *.C7 B1.2 B2.2 C1.2 C2.2 C3.2 C4.2 C5.2 C33.1 C40.1 C41.1 C42.1 C43.1 C44.1 C45.1 C47.1 C57.2 C58.2 H.3 K.22 K.25 R1.1 R2.1 R56.2 R60.1 R74.1 R.2 U.2 U.3 Y.2 Y.4 | length 6202.5
  Top Layer w10: *.C7@62.76,2236.2 60.5,2233.94 41.6,2233.94 24.32,2251.21 24.32,2403.43 41.6,2420.7 62.63,2420.7 63.77,2420.7 *.C3 97.98,2422.43 *.15 ; *.C4 97.98,2375.19 *.16 ; *.C1 97.98,2516.92 *.13 *.14 *.15 ; U.3@81.54,671.81 84.41,668.93 U.3 U.2 ; *.17 *.18 *.19 *.20 *.21 *.22 *.23 *.24 515.3,1786.21 ; *.12 *.11 *.10 *.9 *.8 ; *.37 *.36 *.33 ; *.26@414.32,2041.21 411.05,2044.48 *.26 *.32 ; v1(450,1030) 455.41,1030 469.04,1016.37 K.22 685.16,1016.37 K.25 ; *.5 *.6 *.7 *.8 ; *.4 *.3 *.2 *.1 457.82,2375.19 *.29 ; *.4@585.04,2516.92 623.83,2555.71 B1.2 795,2544.09 821.5,2517.6 857.4,2517.6 v1(910,2465) 1044.29,2330.71 B2.2@1090,2330.71 ; R74.1@587,426.29 R74.1 C57.2 C58.2 588.21,605 v1(645,605) ; *.A3 634.4,1806.29 624.64,1796.53 606.36,1796.53 604.64,1796.53 589.32,1781.21 520.3,1781.21 515.3,1786.21 ; *.A10 601.92,2138.97 601.56,2138.97 554.32,2186.21 *.28 ; v1@830,1265.77 v1(832.71,1263.06) ; R60.1 952,978.71 967,963.71 1003.71,963.71 v3(1005,965) ; *.16 *.15 ; *.16 242.08,2375.19 *.38 322.39,2361.02 *.39 *.30 ; *.32 *.35 *.34 *.31 *.25 515.3,1868.89 515.3,1786.21 ; *.32 *.33 ; *.33 *.27 *.28 ; *.8 375.54,2485.43 375.54,2400.78 *.30 ; *.30 377.51,2361.02 *.29 ; *.28 *.29
  Bottom Layer w10: C4.2@-368.73,1098.79 C4.2 ; C4.2@-326.14,1096.85 -341.81,1112.52 C4.2 ; C4.2@-326.1,1128.19 -339.33,1128.19 C4.2 ; C42.1@41.12,817.9 C42.1 ; R56.2@43,627.1 R56.2@43,634.6 ; C33.1@43,725.25 C33.1@43,732.75 ; C42.1@43,823.52 C42.1 ; C42.1@45,814.02 C42.1 ; C43.1 C43.1@68,383.18 ; R2.1 R1.1 C40.1 C41.1 778,2398.71 844.29,2465 v1(910,2465) ; 779.72,1265 830.77,1265 v1(832.71,1263.06) ; H.3 875.82,1527.16 896.77,1506.21 974.14,1506.21 980,1512.07 R.2 980,1631.76 C3.2 1017.7,1657.43 C3.2@990,1651.21 ; C2.2 862.5,1115.21 847.5,1130.21 847.5,1137.71 832.71,1152.51 v1(832.71,1263.06) ; C2.2@875.43,1107.79 Y.2 Y.2@945.84,1105.82 ; C5.2 938,1358.71 842.35,1263.06 v1(832.71,1263.06) ; Y.4@987.18,1056.61 Y.4 C1.2@1046.57,1054.64 ; 1060,1011.21 C1.2
  other v1: -80,655
INTRP: K.18 R13.1 | length 671.3
  Top Layer w10: R13.1 137,825 152,810 v1(190,810) ; v1(580,1110) 585.41,1110 590.41,1105 645.47,1105 645.79,1104.68 K.18
  Bottom Layer w10: v1(190,810) 326.21,810 ; 331.21,810 555,1033.79 555,1085 v1(580,1110)
INV_TO_RJ45: CN.10 R9.1 | length 692.9
  Top Layer w10: R9.1 157,513.71 172,498.71 179.5,498.71 311.17,367.05 387.6,367.05 427.72,326.93 CN.10@765,326.93
JUMPERS: D8.2 R8.1 R80.1 | length 7.5
  Bottom Layer w10: R8.1 R8.1@-173,1777.5
KSZ_RST_OUT: D8.1 D9.1 K.24 R55.1 | length 620.2
  Top Layer w10: v1(435,971.69) 440,976.69 619.88,976.69 K.24
  Bottom Layer w10: 274.35,925 305,925 335.9,955.9 335.9,993.02 D9.1@356.81,1013.93 ; D8.1 D9.1 D9.1@356.81,1013.93 ; v1(435,971.69) 399.06,971.69 D9.1@356.81,1013.93
MAIN_RESET: *.A1 H.6 R80.2 | length 293.3
  Top Layer w10: *.A1@637.35,1713.77 *.A1 634.4,1713.03 644.16,1703.27 691.05,1703.27 v1(739.32,1655)
  Bottom Layer w10: R80.2 R80.2@-124.21,1903.79 ; v1@750,1655 799.32,1704.32 H.6 ; H.6@877.88,1705.29 H.6@881.93,1709.35
NetR9_2: R9.2 U.4 | length 73.2
  Top Layer w10: R9.2 84.41,522.62 U.4
PHY_LED0: K.23 R59.2 U.1 | length 661.6
  Top Layer w10: U.1 135.59,739.8 R59.2 137,748.71 152,763.71 186.67,763.71 419.64,996.69 ; 424.64,996.69 K.23
PHY_RX_N: CN.6 K.3 | length 15.8
  Top Layer w8: CN.6@541.47,810 CN.6@550.47,819 ; K.3@683.84,950.09 K.3 K.3@686,950.57
PHY_RX_P: CN.3 K.4 | length 13.9
  Top Layer w8: CN.3@691.47,710 CN.3@699.99,718.53 ; K.4@703.53,950.09 K.4
PHY_TX_N: CN.2 K.5 | length 13.3
  Top Layer w8: K.5 K.5@724.9,951.04 ; CN.2@741.47,810 CN.2@741.47,822.73
PHY_TX_P: CN.1 K.6 | length 1.9
  Top Layer w8: K.6 K.6@745.53,950.09
RedLED: *.A7 D2.1 | length 241.4
  Top Layer w10: *.A7 635.88,1995.76 636.64,1995 637.21,1995 647.21,1985 v1(684.32,1985) ; v1(685,1895) D2.1@781.1,1895
  Bottom Layer w10: v1(684.32,1985) 684.66,1984.66 684.66,1895.34 v1(685,1895)
REXT: K.9 R60.2 | length 125.1
  Top Layer w10: K.9 855.34,1016.37 878,993.71 R60.2
RJ_45_GND: C57.1 C58.1 CN.8 R74.2 | length 406.5
  Top Layer w10: CN.8@440,810 440,684.29 513,611.29 C58.1 C57.1 R74.2
RMII_MDC: *.C15 C.1 R47.2 | length 2072.1
  Top Layer w10: v1(39.32,1615) 39.32,1836.21 45.9,1842.79 55.74,1842.79 61.84,1848.89 *.C15@61.84,1851.84 ; *.C15@63.31,1850.36 65.5,1852.55 *.C15 ; C.1 1045,1256.21 1045,1191.21 1060,1176.21 R47.2
  Bottom Layer w10: v1@50,1615 58.79,1615 223.79,1780 893.79,1780 918.79,1805 1081.21,1805 1100,1786.21 1100,1341.21 C.1@1015,1256.21
RMII_MDIO: *.C14 C.2 R46.2 | length 2215.7
  Top Layer w10: v1(34.32,1565) 10,1589.32 10,1846.89 53.14,1890.03 55.74,1890.03 62.87,1897.17 62.87,1899.38 65.5,1902.01 *.C14 ; R46.2 930,1188.21 C.2
  Bottom Layer w10: v1@45,1565 240,1760 908.79,1760 938.79,1790 1066.21,1790 1080,1776.21 1080,1356.21 1045,1321.21 980,1321.21 C.2
RST_D7: *.D7 R8.2 | length 206.3
  Top Layer w10: *.D7 468.06,1680.93 468.06,1680.31 473.97,1680.31 480.78,1673.5 480.78,1664.22 510,1635 564.73,1635 589.73,1610 v1(629.32,1610)
  Bottom Layer w10: R8.2@-247,1762.5 R8.2
RXD0: K.13 P.5 R52.1 | length 456.9
  Top Layer w10: R52.1 465,1483.24 P.5 ; 526.21,1336.21 580,1336.21 744.21,1172 K.13
RXD1: K.12 P.6 R53.1 | length 218.7
  Top Layer w10: R53.1 533.28,1436.26 P.6 ; P.6@563.57,1399.17 568.93,1404.54 P.6@568.93,1407.31 ; K.12 769.8,1176.91
RXER: K.17 R56.1 | length 722
  Top Layer w10: v1(620,1135) 655,1135 665,1125 665,1124.27 665.16,1124.12 665.16,1101.33 K.17
  Bottom Layer w10: 203.71,658.71 605,1060 605,1120 v1(620,1135)
SWITCH0: *.A6 B2.1 R3.1 | length 744.1
  Top Layer w10: *.A6@640,1940 900,1940 960,2000 987.56,2000 v1(990,2002.44) ; v1@990,2000 995.41,2000 1015.41,1980 1068.5,1980 1095,1953.5 B2.1
  Bottom Layer w10: v1(990,2002.44) 990,2181.71 1027.5,2219.21 R3.1
SWITCH1: *.A8 B1.1 R4.1 | length 440.8
  Top Layer w10: *.A8@634.4,2041.53 *.A8 637.14,2047.22 639.92,2050 v1(684.32,2050) ; v1(695,2145) 696.45,2145 710.86,2159.41 768.5,2159.41 795,2185.91 B1.1 810.71,2210 v1(875,2210)
  Bottom Layer w10: v1@695,2050 v1(695,2145) ; v1(875,2210) 940.79,2210 R4.1
TXD0: K.20 P.1 R49.2 | length 283.8
  Top Layer w10: P.1 110,1449.54 R49.2 ; 539.26,1055.74 K.20
  Bottom Layer w10: v1(174.7,1309.31) 174.9,1309.51 264.51,1309.51 v1(264.7,1309.7)
TXD1: K.21 P.2 R51.2 | length 113.8
  Top Layer w10: P.2 165,1407.51 195,1437.51 R51.2 ; P.2@168.93,1404.54 P.2@173.93,1409.54 ; K.21@620.04,1036.21 K.21
TXEN: K.19 P.3 R48.2 | length 100.3
  Top Layer w10: P.3 265,1483.63 R48.2
UART_RXD: *.A13 H.5 | length 748
  Top Layer w10: *.A13@637.35,2280.7 *.A13 634.4,2279.76 644.16,2270 v1(684.32,2270) ; v1@830,1801.21 830,1680.27 H.5
  Bottom Layer w10: v1@695,2270 748,2217 748,1888.21 v1(830,1806.21)
UART_TXD: *.A11 H.4 | length 725.7
  Top Layer w10: *.A11 637.14,2188.95 638.19,2190 v1(684.32,2190) ; v1(785,1806.21) 785,1666.21 H.4
  Bottom Layer w10: v1@695,2190 725.59,2159.41 725.59,1865.62 v1(785,1806.21)
VDD_1v2: C45.2 C47.2 K.1 | length 660.9
  Top Layer w10: v1(545,950) 644.38,950 K.1
  Bottom Layer w10: C45.2 C45.2@127.96,558.96 ; 155.96,585.96 516.17,946.17 541.17,946.17 v1(545,950)
VDDA_3.3: C43.2 C44.2 FL.2 K.2 | length 768.3
  Top Layer w10: v1(525,905) 635,905 665.16,935.16 665.16,951.09 K.2
  Bottom Layer w10: C44.2 208.17,292.9 FL.2 ; C43.2 C43.2@140,381.18 ; 185,575.36 308.77,699.12 387.19,699.12 482.52,794.46 482.52,862.52 v1(525,905)
VDDIO: C33.2 C42.2 K.14 | length 816.3
  Top Layer w10: v1(705,1171.21) 724.66,1151.55 724.66,1101.15 K.14
  Bottom Layer w10: C33.2@115,734.75 C33.2@117,732.75 ; 155,834.65 179.29,834.65 179.64,835 330,835 ; 335,835 535,1035 535,1121.57 584.64,1171.21 v1(705,1171.21)
X0: C1.1 K.7 Y.3 | length 573.1
  Top Layer w10: K.7 778.46,977 820.47,935 v1(825,935)
  Bottom Layer w10: v1(825,935) 1030,935 1097.5,1002.5 1097.5,1085.21 1067.5,1115.21 C1.1 ; Y.3 C1.1@1054.57,1107.79
X1: C2.1 K.8 Y.1 | length 204.4
  Top Layer w10: K.8 804.12,996.69 814.59,986.21 v1(820,986.21)
  Bottom Layer w10: v1(820,986.21) 823.83,990.04 843.83,990.04 865,1011.21 865,1036.21 C2.1 ; C2.1@883.43,1054.64 Y.1
pads on no net: *.A2 *.A5 *.A12 *.A14 *.A15 *.A16 *.A17 *.A18 *.B1 *.B2 *.B3 *.B4 *.B5 *.B6 *.B7 *.B8 *.C2 *.C5 *.C6 *.C8 *.C9 *.C10 *.C11 *.C12 *.C13 *.C16 *.C17 *.C18 *.TP1 *.TP2 *.TP3 *.TP4 *.TP5 *.TP6 *.TP7 *.TP8 *.TP9 *.TP10 *.TP11 *.TP12 CN.7 CN.11 CN.12 CN.None CN.S1 CN.S2

## Polygon pours and split planes (outlines as drawn)
GND on GND (split plane): 1159.9,20.1 20.1,20.1 20.1,1720 630,1720 630,2601.12 1159.9,2601.12
3v3 on 3v3 (split plane): 1159.9,20.1 20.1,20.1 20.1,2601.12 1159.9,2601.12

## Other copper
Top Layer:
  rectangle net GND: 170,1766.21 545,2466.21
GND (plane layer: these items are gaps in the copper):
  rectangle: 15,1720 630,2605

## Silkscreen, mask and mechanical layers (free items; w line width, h text height)
Mechanical 1:
  lines w10: 1180,2620 1180,0 0,0 0,2621.21 1180,2621.21

## Text inside footprints (layer, text, board x,y; h text height)
CN: Mechanical 4 "12" at 306.24,404.79 h73.82 r180; Mechanical 4 "11" at 441.1,349.58 h73.82 r180; Mechanical 4 "10" at 721.86,414.65 h73.82 r180; Mechanical 4 "9" at 856.94,349.61 h73.82 r180; Mechanical 4 "FRONT" at 548.79,206.61 h73.82 r180; Mechanical 4 "RIGHT" at 323.01,81.05 h73.82 r180; Mechanical 4 "LEFT" at 812.35,80.64 h73.82 r180; Mechanical 4 "2" at 761.99,795.98 h73.82 r180; Mechanical 4 "4" at 661.58,795.6 h73.82 r180; Mechanical 4 "6" at 561.18,796.72 h73.82 r180; Mechanical 4 "8" at 460.8,796.28 h73.82 r180; Mechanical 4 "7" at 511.13,695.61 h73.82 r180; Mechanical 4 "5" at 611.47,696.03 h73.82 r180; Mechanical 4 "3" at 711.75,695.47 h73.82 r180; Mechanical 4 "1" at 812.44,695.93 h73.82 r180; Mechanical 4 "12" at 306.24,404.79 h73.82 r180; Mechanical 4 "11" at 441.1,349.58 h73.82 r180; Mechanical 4 "10" at 721.86,414.65 h73.82 r180; Mechanical 4 "9" at 856.94,349.61 h73.82 r180; Mechanical 4 "FRONT" at 548.79,206.61 h73.82 r180; Mechanical 4 "RIGHT" at 323.01,81.05 h73.82 r180; Mechanical 4 "LEFT" at 812.35,80.64 h73.82 r180; Mechanical 4 "2" at 761.99,795.98 h73.82 r180; Mechanical 4 "4" at 661.58,795.6 h73.82 r180; Mechanical 4 "6" at 561.18,796.72 h73.82 r180; Mechanical 4 "8" at 460.8,796.28 h73.82 r180; Mechanical 4 "7" at 511.13,695.61 h73.82 r180; Mechanical 4 "5" at 611.47,696.03 h73.82 r180; Mechanical 4 "3" at 711.75,695.47 h73.82 r180; Mechanical 4 "1" at 812.44,695.93 h73.82 r180; Bottom Overlay "+" at 331.47,280 h73.82 r180; Bottom Overlay "-" at 456.09,239.28 h73.82 r180; Bottom Overlay "-" at 811.47,355 h73.82 r180; Bottom Overlay "+" at 841.47,220 h73.82 r180